# EAGLE board msop (EAGLE 6.2)
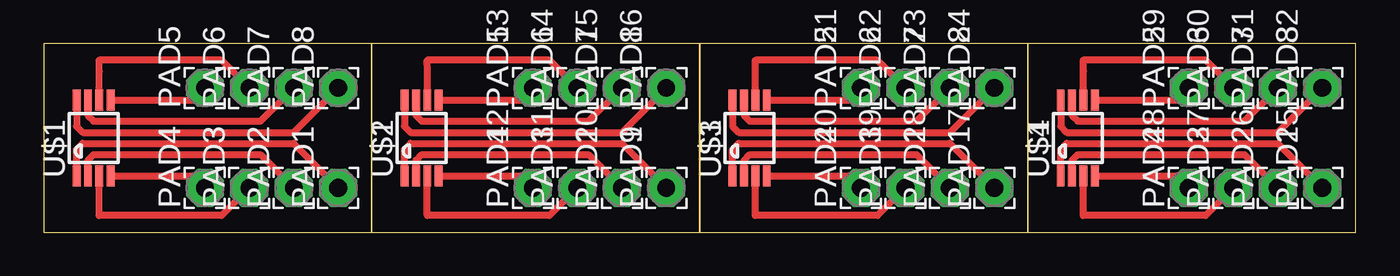
[diagram p0: board, top side]

Size 74.92 x 10.78 mm. Coordinates in mm from the lower left corner, seen from the top.
Outline: 18.72,0 18.72,10.78 0,10.78 0,0 18.72,0
Outline: 37.46,0 37.46,10.78 18.73,10.78 18.73,0 37.46,0
Outline: 56.19,0 56.19,10.78 37.47,10.78 37.47,0 56.19,0
Outline: 74.92,0 74.92,10.78 56.2,10.78 56.2,0 74.92,0
Copper layers (1*16): Top 0.035mm / dielectric 1.5mm / Bottom 0.035mm
Design rules: minimum track width 10mil, minimum drill 24mil, track to track 8mil, track to pad 8mil, pad to pad 8mil, via to via 8mil, smd to smd 8mil, copper to edge 40mil, drill to drill 8mil, minimum pad ring 10mil, minimum via ring 8mil, stop-mask expansion 4mil, vias tented up to drill 0mil, thermal gap 10mil

## Footprints (pad centres in the part's own frame; a part is rotated, then mirrored left to right if it is on the bottom)
2,15/1,0 = drill 1.016 pad 2.159 octagon: 1 0,0
UMAX8 = smd 0.45 x 1.2: 1 -0.975,-2.175; 2 -0.325,-2.175; 3 0.325,-2.175; 4 0.975,-2.175; 5 0.975,2.175; 6 0.325,2.175; 7 -0.325,2.175; 8 -0.975,2.175

## Placement (x,y rotation side)
PAD1  [2,15/1,0]  16.82,2.54 90 top
PAD2  [2,15/1,0]  14.28,2.54 90 top
PAD3  [2,15/1,0]  11.74,2.54 90 top
PAD4  [2,15/1,0]  9.2,2.54 90 top
PAD5  [2,15/1,0]  9.2,8.26 90 top
PAD6  [2,15/1,0]  11.74,8.26 90 top
PAD7  [2,15/1,0]  14.28,8.26 90 top
PAD8  [2,15/1,0]  16.82,8.26 90 top
PAD9  [2,15/1,0]  35.55,2.54 90 top
PAD10  [2,15/1,0]  33.01,2.54 90 top
PAD11  [2,15/1,0]  30.47,2.54 90 top
PAD12  [2,15/1,0]  27.93,2.54 90 top
PAD13  [2,15/1,0]  27.93,8.26 90 top
PAD14  [2,15/1,0]  30.47,8.26 90 top
PAD15  [2,15/1,0]  33.01,8.26 90 top
PAD16  [2,15/1,0]  35.55,8.26 90 top
PAD17  [2,15/1,0]  54.28,2.54 90 top
PAD18  [2,15/1,0]  51.74,2.54 90 top
PAD19  [2,15/1,0]  49.2,2.54 90 top
PAD20  [2,15/1,0]  46.66,2.54 90 top
PAD21  [2,15/1,0]  46.66,8.26 90 top
PAD22  [2,15/1,0]  49.2,8.26 90 top
PAD23  [2,15/1,0]  51.74,8.26 90 top
PAD24  [2,15/1,0]  54.28,8.26 90 top
PAD25  [2,15/1,0]  73.02,2.54 90 top
PAD26  [2,15/1,0]  70.47,2.54 90 top
PAD27  [2,15/1,0]  67.93,2.54 90 top
PAD28  [2,15/1,0]  65.39,2.54 90 top
PAD29  [2,15/1,0]  65.39,8.26 90 top
PAD30  [2,15/1,0]  67.93,8.26 90 top
PAD31  [2,15/1,0]  70.47,8.26 90 top
PAD32  [2,15/1,0]  73.02,8.26 90 top
U$1  DS1825U  [UMAX8]  2.85,5.4 0 top
U$2  DS1825U  [UMAX8]  21.58,5.4 0 top
U$3  DS1825U  [UMAX8]  40.31,5.4 0 top
U$4  DS1825U  [UMAX8]  59.05,5.4 0 top

## Library data of the parts
PAD1-PAD32 = wirepad
U$1-U$4 = temp_sensors

## Nets
N$1: PAD1.1 U$1.1
N$2: PAD2.1 U$1.2
N$3: PAD3.1 U$1.3
N$4: PAD4.1 U$1.4
N$5: PAD8.1 U$1.8
N$6: PAD7.1 U$1.7
N$7: PAD6.1 U$1.6
N$8: PAD5.1 U$1.5
N$9: PAD9.1 U$2.1
N$10: PAD10.1 U$2.2
N$11: PAD11.1 U$2.3
N$12: PAD12.1 U$2.4
N$13: PAD16.1 U$2.8
N$14: PAD15.1 U$2.7
N$15: PAD14.1 U$2.6
N$16: PAD13.1 U$2.5
N$17: PAD17.1 U$3.1
N$18: PAD18.1 U$3.2
N$19: PAD19.1 U$3.3
N$20: PAD20.1 U$3.4
N$21: PAD24.1 U$3.8
N$22: PAD23.1 U$3.7
N$23: PAD22.1 U$3.6
N$24: PAD21.1 U$3.5
N$25: PAD25.1 U$4.1
N$26: PAD26.1 U$4.2
N$27: PAD27.1 U$4.3
N$28: PAD28.1 U$4.4
N$29: PAD32.1 U$4.8
N$30: PAD31.1 U$4.7
N$31: PAD30.1 U$4.6
N$32: PAD29.1 U$4.5

## Tracks (layer width: path | path; a pad name or v marks a point on that pad's centre or on a via)
N$1
  Top 0.406: U$1.1 1.87,4.74 2.21,5.08 14.28,5.08 PAD1.1
N$2
  Top 0.406: U$1.2 2.52,4.12 2.85,4.45 12.37,4.45 PAD2.1
N$3
  Top 0.406: PAD3.1 10.15,0.95 3.17,0.95 U$1.3
N$4
  Top 0.406: U$1.4 8.52,3.22 PAD4.1
N$5
  Top 0.406: U$1.8 1.87,6.05 2.21,5.71 14.28,5.71 PAD8.1
N$6
  Top 0.406: U$1.7 2.52,6.67 2.85,6.35 12.37,6.35 PAD7.1
N$7
  Top 0.406: PAD6.1 10.15,9.84 3.17,9.84 3.17,9.21 U$1.6
N$8
  Top 0.406: U$1.5 8.52,7.57 PAD5.1
N$9
  Top 0.406: U$2.1 20.6,4.74 20.94,5.08 33.01,5.08 PAD9.1
N$10
  Top 0.406: U$2.2 21.25,4.12 21.58,4.45 31.1,4.45 PAD10.1
N$11
  Top 0.406: PAD11.1 28.88,0.95 21.9,0.95 U$2.3
N$12
  Top 0.406: U$2.4 27.25,3.22 PAD12.1
N$13
  Top 0.406: U$2.8 20.6,6.05 20.94,5.71 33.01,5.71 PAD16.1
N$14
  Top 0.406: U$2.7 21.25,6.67 21.58,6.35 31.1,6.35 PAD15.1
N$15
  Top 0.406: PAD14.1 28.88,9.84 21.9,9.84 21.9,9.21 U$2.6
N$16
  Top 0.406: U$2.5 27.25,7.57 PAD13.1
N$17
  Top 0.406: U$3.1 39.34,4.74 39.68,5.08 51.74,5.08 PAD17.1
N$18
  Top 0.406: U$3.2 39.99,4.12 40.31,4.45 49.84,4.45 PAD18.1
N$19
  Top 0.406: PAD19.1 47.62,0.95 40.63,0.95 U$3.3
N$20
  Top 0.406: U$3.4 45.98,3.22 PAD20.1
N$21
  Top 0.406: U$3.8 39.34,6.05 39.68,5.71 51.74,5.71 PAD24.1
N$22
  Top 0.406: U$3.7 39.99,6.67 40.31,6.35 49.84,6.35 PAD23.1
N$23
  Top 0.406: PAD22.1 47.62,9.84 40.63,9.84 40.64,9.21 U$3.6
N$24
  Top 0.406: U$3.5 45.98,7.57 PAD21.1
N$25
  Top 0.406: U$4.1 58.07,4.74 58.41,5.08 70.47,5.08 PAD25.1
N$26
  Top 0.406: U$4.2 58.72,4.12 59.05,4.45 68.57,4.45 PAD26.1
N$27
  Top 0.406: PAD27.1 66.35,0.95 59.36,0.95 U$4.3
N$28
  Top 0.406: U$4.4 64.71,3.22 PAD28.1
N$29
  Top 0.406: U$4.8 58.07,6.05 58.41,5.71 70.47,5.71 PAD32.1
N$30
  Top 0.406: U$4.7 58.72,6.67 59.05,6.35 68.57,6.35 PAD31.1
N$31
  Top 0.406: PAD30.1 66.35,9.84 59.36,9.84 59.37,9.21 U$4.6
N$32
  Top 0.406: U$4.5 64.71,7.57 PAD29.1

## Text on the board
_tNames: PAD5 | PAD6 | PAD7 | PAD8 | PAD5 | PAD6 | PAD7 | PAD8 | PAD5 | PAD6 | PAD7 | PAD8 | PAD5 | PAD6 | PAD7 | PAD8 | U$1 | U$1 | U$1 | U$1 | PAD4 | PAD3 | PAD2 | PAD1 | PAD4 | PAD3 | PAD2 | PAD1 | PAD4 | PAD3 | PAD2 | PAD1 | PAD4 | PAD3 | PAD2 | PAD1